# EAGLE board PRA_2_5_23@2 (EAGLE 6.3)
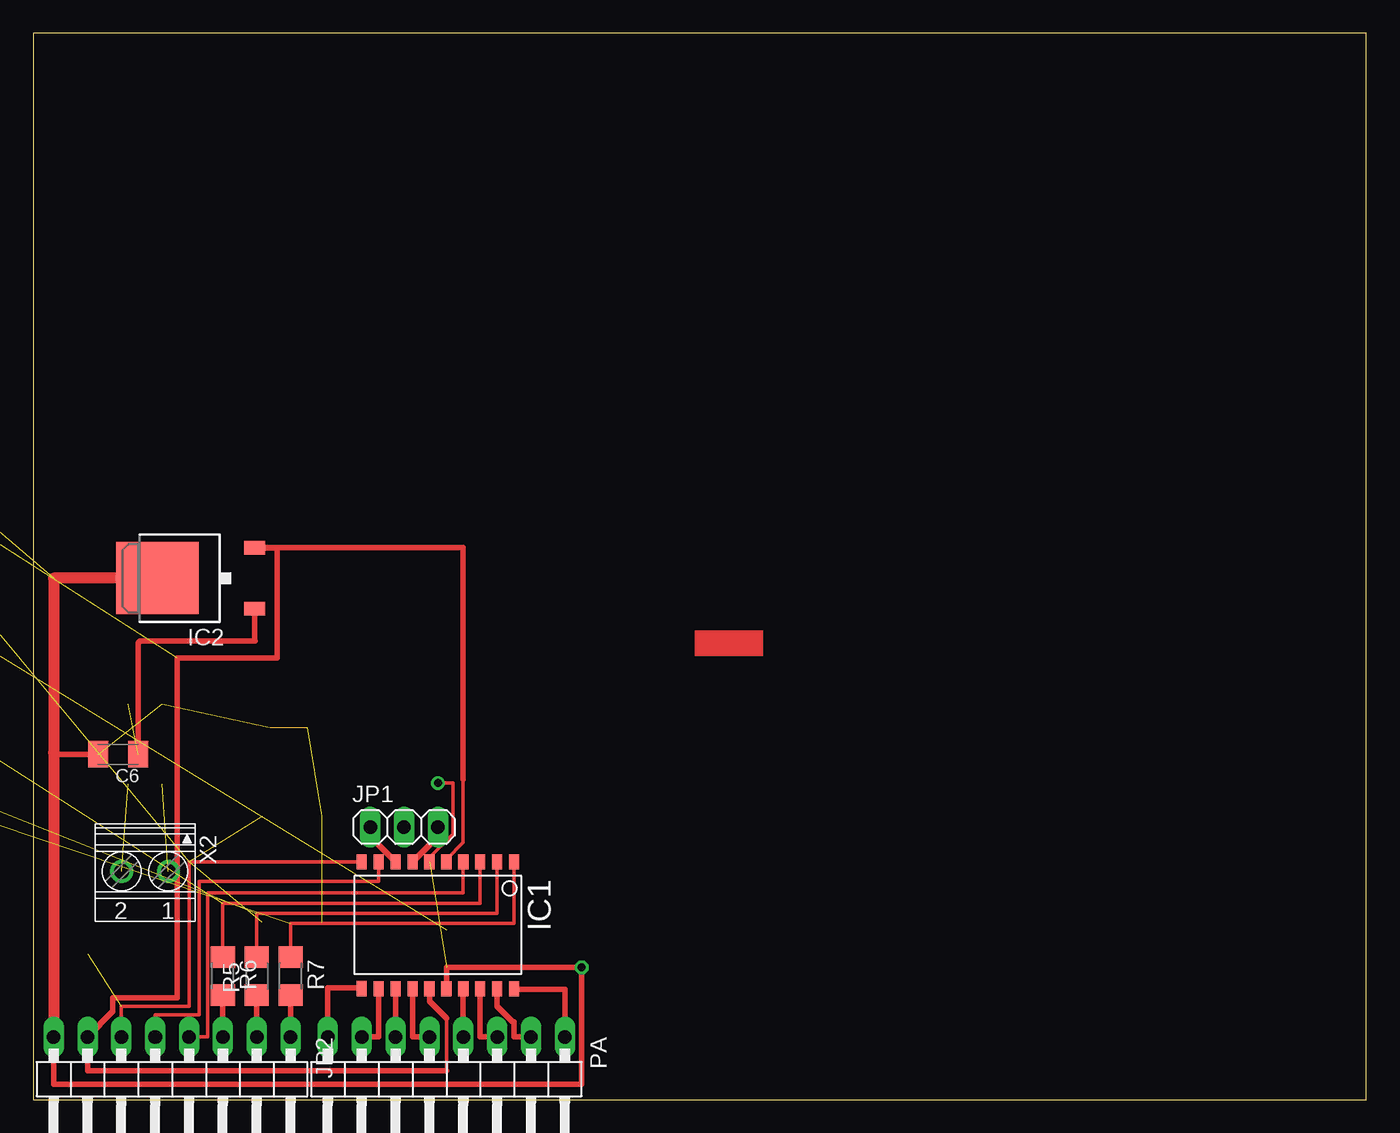
[diagram p0: board, top side]
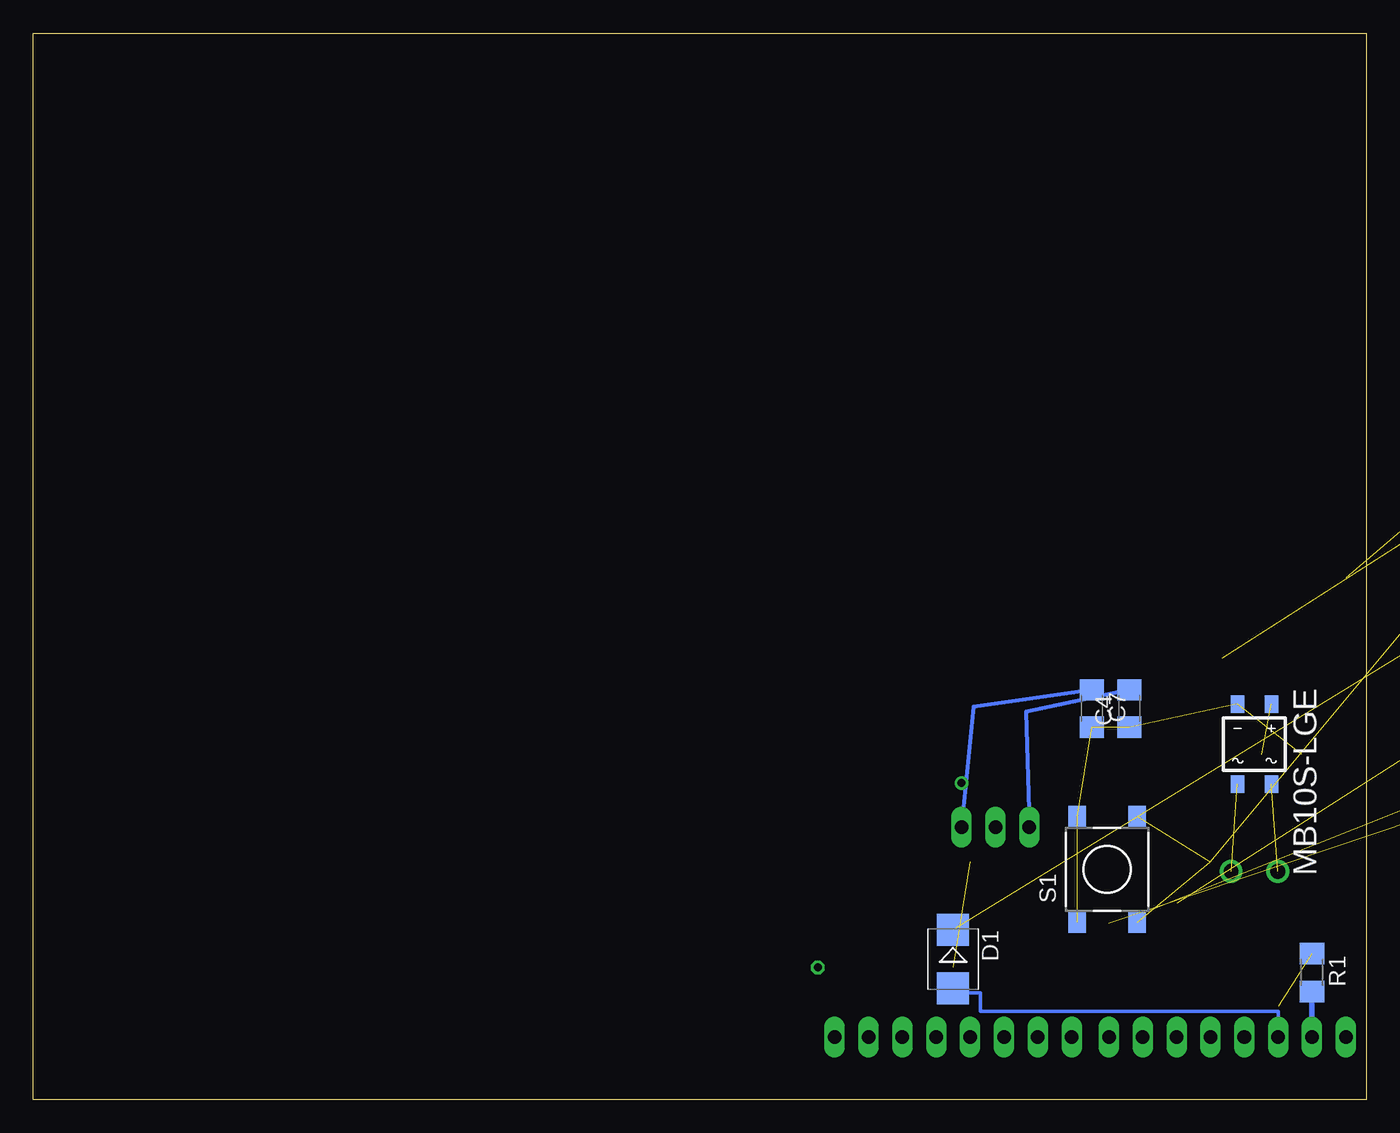
[diagram p1: board, bottom side, seen from below]

Size 100 x 80 mm. Coordinates in mm from the lower left corner, seen from the top.
Outline: 0,0 100,0 100,80 0,80 0,0
Copper layers (1*16): Top 0.035mm / dielectric 1.5mm / Bottom 0.035mm
Design rules "default": minimum track width 10mil, minimum drill 24mil, track to track 8mil, track to pad 8mil, pad to pad 8mil, via to via 8mil, smd to smd 8mil, copper to edge 40mil, drill to drill 8mil, minimum pad ring 10mil, minimum via ring 8mil, stop-mask expansion 4mil, vias tented up to drill 0mil, thermal gap 10mil

## Footprints (pad centres in the part's own frame; a part is rotated, then mirrored left to right if it is on the bottom)
C1206 = smd 1.6 x 1.8: 1 -1.4,0; 2 1.4,0
C1206K = smd 1.5 x 2: 1 -1.5,0; 2 1.5,0
SMB = smd 2.4 x 2.4: A 2.2,0; C -2.2,0
A0R-JMP = smd 1.5 x 1.3: 1 0,1.7; 2 0,0; 3 0,-1.7
SO20L = smd 0.762 x 1.143: 1 -5.08,-5.131; 2 -3.81,-5.131; 3 -2.54,-5.131; 4 -1.27,-5.131; 5 0,-5.131; 6 1.27,-5.131; 7 2.54,-5.131; 8 3.81,-5.131; 9 5.08,-5.131; 10 6.35,-5.131; 11 6.35,4.369; 12 5.08,4.394; 13 3.81,4.394; 14 2.54,4.394; 15 1.27,4.394; 16 0,4.394; 17 -1.27,4.394; 18 -2.54,4.394; 19 -3.81,4.394; 20 -5.08,4.394
TO252 = smd 1 x 1.6: 1 -2.28,-4.8; 2 2.28,-4.8 | smd 5.4 x 6.2: 3 0,2.5
1X03 = drill 1.016 long: 1 -2.54,0; 2 0,0; 3 2.54,0
1X08/90 = drill 1.016 long: 1 -8.89,-3.81; 2 -6.35,-3.81; 3 -3.81,-3.81; 4 -1.27,-3.81; 5 1.27,-3.81; 6 3.81,-3.81; 7 6.35,-3.81; 8 8.89,-3.81
1206 = smd 1.6 x 1.803: A -1.422,0; C 1.422,0
MBS = smd 1 x 1.3: + -1.27,-3; - 1.27,-3; AC1 -1.27,3; AC2 1.27,3
R1206 = smd 1.6 x 1.803: 1 -1.422,0; 2 1.422,0
M1406 = smd 1.4 x 1.8: 1 -1.7,0; 2 1.7,0
DTSM-6 = smd 1.55 x 1.3: 1 -3.975,2.25; 2 3.975,2.25; 3 -3.975,-2.25; 4 3.975,-2.25
1751248 = drill 1.1 pad 1.7: 1 -1.75,-0.1; 2 1.75,-0.1

## Placement (x,y rotation side)
C1  100n  [C1206]  -16.51,53.34 0 top  (outside the outline)
C4  33p  [C1206]  17.78,29.34 90 bottom
C5  10uTantal  [C1206K]  -29.21,59.69 0 top  (outside the outline)
C6  10u/20VTantal  [C1206K]  6.35,25.91 180 top
C7  33p  [C1206]  20.57,29.34 270 bottom
D1  4148  [SMB]  30.99,10.54 270 bottom
GND  0R-JUMPA  [A0R-JMP]  -58.42,35.56 0 top  (outside the outline)
IC1  TINY26LS  [SO20L]  30.99,12.7 180 top
IC2  LM2936DT-5.0  [TO252]  11.81,39.12 90 top
JP1  [1X03]  27.81,20.45 0 top
JP2  [1X08/90]  10.41,0.89 180 top
LED1  [1206]  -35.56,58.42 0 top  (outside the outline)
MB10S-LGE  B10S  [MBS]  8.38,26.67 180 bottom
MISO_PRG  0R-JUMPA  [A0R-JMP]  -35.56,35.56 0 top  (outside the outline)
MOSI_PRG  0R-JUMPA  [A0R-JMP]  -46.99,35.56 0 top  (outside the outline)
PA  [1X08/90]  30.99,0.89 180 top
R1  10k  [R1206]  4.06,9.53 270 bottom
R2  1k  [R1206]  -36.83,53.34 0 top  (outside the outline)
R3  0R  [M1406]  -58.42,43.18 0 top  (outside the outline)
R5  4k7  [R1206]  16.76,9.27 90 top
R6  4k7  [R1206]  14.22,9.27 270 top
R7  4k7  [R1206]  19.3,9.27 270 top
RESET/  0R-JUMPA  [A0R-JMP]  -22.86,45.72 0 top  (outside the outline)
S1  DTSM-6  [DTSM-6]  19.43,17.27 90 bottom
SCK_PRG  0R-JUMPA  [A0R-JMP]  -34.29,45.72 0 top  (outside the outline)
VCC  0R-JUMPA  [A0R-JMP]  -45.72,45.72 0 top  (outside the outline)
X2  1751248  [1751248]  8.38,17.02 180 top

## Library data of the parts
C1 C4-C7 R1-R3 R5-R7 = rcl
D1 = diode
GND MISO_PRG MOSI_PRG RESET/ SCK_PRG VCC = jump-0r-smd
IC1 = atmel; MPN: ATTINY26L-8SU; OC_FARNELL: 9171665; OC_NEWARK: 01M6921
IC2 = national-semiconductor; MF: NATIONAL SEMICONDUCTOR; MPN: LM2936DT-5.0/NOPB; OC_FARNELL: 1286864; OC_NEWARK: 41K4501
JP1 JP2 PA = pinhead
LED1 = led
MB10S-LGE = rectifier
S1 = switch-tact
X2 = con-phoenix-350; OC_FARNELL: unknown; OC_NEWARK: unknown

## Nets
GND: C1.2 C4.1 C5.2 C6.2 C7.2 GND.2 IC1.6 IC1.16 IC2.3 JP2.8 LED1.C MB10S-LGE.- S1.1 S1.2
MISO: JP2.2 R5.1
MISO_JUMP_RES: MISO_PRG.2 R3.1
MISO_PRG: IC1.2 R3.2 R5.2
MOSI: JP2.1 R7.2
MOSI_PRG: IC1.1 MOSI_PRG.2 R7.1
N$15: C4.2 IC1.8 JP1.1
N$16: C7.1 IC1.7 JP1.3
N$17: MB10S-LGE.AC2 X2.1
N$29: MB10S-LGE.AC1 X2.2
N$30: LED1.A R2.1
PA0: IC1.20 PA.1
PA1: IC1.19 PA.2
PA2: IC1.18 PA.3
PA3: IC1.17 PA.4
PA4: IC1.14 PA.5
PA5: IC1.13 PA.6
PA6: IC1.12 PA.7
PA7: IC1.11 PA.8
PB3: IC1.4 JP2.4
PB6: IC1.9 JP2.5
PB7: C1.1 D1.A IC1.10 JP2.6 R1.1 S1.3 S1.4
RESET: D1.C RESET/.2
SCK: JP2.3 R6.2
SCK_PRG: IC1.3 R6.1 SCK_PRG.2
VCC: C5.1 IC1.5 IC1.15 IC2.2 JP2.7 R1.2 R2.2 VCC.2
VIN_PLUS: C6.1 IC2.1 MB10S-LGE.+

## Tracks (layer width: path | path; a pad name or v marks a point on that pad's centre or on a via)
GND  (via drill 0.6)  (10 unrouted)
  Top 0.254: IC1.6 29.72,18.16 31.5,19.94 31.5,23.75 v30.35,23.75
  Top 0.406: C6.2 1.52,25.91 1.52,26.04 | IC1.16 30.99,9.91 v41.15,9.91 41.15,1.14 1.52,1.14 JP2.8
  Top 0.813: IC2.3 1.52,39.12 1.52,26.04 JP2.8
MISO
  Top 0.406: R5.1 JP2.2
MISO_JUMP_RES  (1 unrouted)
MISO_PRG  (1 unrouted)
  Top 0.254: R5.2 16.76,13.97 34.8,13.97 IC1.2
MOSI
  Top 0.406: R7.2 JP2.1
MOSI_PRG  (1 unrouted)
  Top 0.254: R7.1 19.3,13.21 36.07,13.21 IC1.1
N$15
  Top 0.406: JP1.1 25.27,19.74 IC1.8
  Bottom 0.305: C4.2 25.53,29.08 JP1.1
N$16
  Top 0.406: JP1.3 30.35,19.74 IC1.7
  Bottom 0.305: C7.1 29.46,29.46 JP1.3
N$17  (1 unrouted)
N$29  (1 unrouted)
N$30  (1 unrouted)
PA0
  Top 0.406: PA.1 39.88,8.26 36.07,8.26 IC1.20
PA1
  Top 0.406: PA.2 36.07,4.7 36.07,5.84 35.94,5.84 34.8,6.99 IC1.19
PA2
  Top 0.406: PA.3 33.53,4.7 IC1.18
PA3
  Top 0.406: PA.4 IC1.17
PA4
  Top 0.406: PA.5 28.45,4.7 IC1.14
PA5
  Top 0.406: PA.6 IC1.13
PA6
  Top 0.406: PA.7 25.91,4.7 IC1.12
PA7
  Top 0.406: PA.8 22.1,8.38 24.64,8.38 IC1.11
PB3
  Top 0.254: JP2.4 13.08,4.7 13.08,15.49 32.26,15.49 IC1.4
PB6
  Top 0.254: IC1.9 25.91,16.38 12.45,16.38 12.45,6.35 9.14,6.35 JP2.5
PB7  (4 unrouted)
  Top 0.254: IC1.10 11.68,17.83 11.68,6.99 6.6,6.99 JP2.6
  Bottom 0.254: JP2.6 6.6,6.6 28.96,6.6 28.96,8 30.99,8 D1.A
RESET  (1 unrouted)
SCK
  Top 0.406: JP2.3 R6.2
SCK_PRG  (1 unrouted)
  Top 0.254: R6.1 14.22,14.73 33.53,14.73 IC1.3
VCC  (3 unrouted)
  Top 0.254: 30.99,2.16 30.99,6.1 | IC1.5 30.99,18.03 32.26,19.3 32.26,24
  Top 0.406: 30.99,2.16 4.06,2.16 JP2.7 5.97,6.6 5.97,7.62 10.79,7.62 10.79,33.15 18.29,33.15 18.29,41.4 17.14,41.4 | IC1.15 29.72,7.37 30.99,6.1 | IC2.2 17.14,41.4 | 32.26,24 32.26,41.4 17.14,41.4
  Bottom 0.406: R1.2 JP2.7
VIN_PLUS  (1 unrouted)
  Top 0.406: IC2.1 16.61,34.44 16.64,34.42 8,34.42 7.85,34.27 C6.1
(copper drawn outside any net)
  shapes: Top area x1